# EAGLE board Grand Jofo (EAGLE 9.7.0)

Size 134.13 x 111.5 mm. Coordinates in mm from the lower left corner, seen from the top.
Outline: 0,0 134.13,0 134.13,111.5 0,111.5 0,0
Copper layers (1*16): Top 0.035mm / dielectric 1.5mm / Bottom 0.035mm
Design rules "default": minimum track width 6mil, minimum drill 0.35mm, track to track 6mil, track to pad 6mil, pad to pad 6mil, via to via 6mil, smd to smd 6mil, copper to edge 40mil, drill to drill 6mil, minimum pad ring 10mil, minimum via ring 8mil, stop-mask expansion 4mil, vias tented up to drill 0mil, thermal gap 10mil

## Footprints (pad centres in the part's own frame; a part is rotated, then mirrored left to right if it is on the bottom)
LEDRD254W60D565H860B = drill 0.981 pad 1.581: 1 -1.27,0; 2 1.27,0
BATTERY-GENERIC = drill 1.118 pad 3.15 octagon: + 2.54,0; - -2.54,0
SWITCH-SPDT-PTH-8.5X3.7MM = drill 1.016 pad 1.88: 1 -2.54,0; 2 0,0; 3 2.54,0
DIP762W53P254L1969H508Q14B = drill 0.743 pad 1.343: 1 -3.81,7.62; 2 -3.81,5.08; 3 -3.81,2.54; 4 -3.81,0; 5 -3.81,-2.54; 6 -3.81,-5.08; 7 -3.81,-7.62; 8 3.81,-7.62; 9 3.81,-5.08; 10 3.81,-2.54; 11 3.81,0; 12 3.81,2.54; 13 3.81,5.08; 14 3.81,7.62

## Placement (x,y rotation side)
D1  RED  [LEDRD254W60D565H860B]  124.06,103.59 180 top
D2  RED  [LEDRD254W60D565H860B]  114.38,103.51 180 top
D3  RED  [LEDRD254W60D565H860B]  46.07,8.45 180 top
D4  RED  [LEDRD254W60D565H860B]  39.17,8.24 180 top
P1  BATTERYGENERIC  [BATTERY-GENERIC]  20.56,92.84 180 top
S1  TOGGLE  [SWITCH-SPDT-PTH-8.5X3.7MM]  78.14,100.13 0 top
S3  TOGGLE  [SWITCH-SPDT-PTH-8.5X3.7MM]  92.72,100.13 0 top
S4  TOGGLE  [SWITCH-SPDT-PTH-8.5X3.7MM]  126.71,56.08 0 top
S5  TOGGLE  [SWITCH-SPDT-PTH-8.5X3.7MM]  126.08,47.93 0 top
S6  TOGGLE  [SWITCH-SPDT-PTH-8.5X3.7MM]  57.98,6.99 0 top
S7  TOGGLE  [SWITCH-SPDT-PTH-8.5X3.7MM]  68.63,7.4 0 top
S8  TOGGLE  [SWITCH-SPDT-PTH-8.5X3.7MM]  7.42,39.79 0 top
S9  TOGGLE  [SWITCH-SPDT-PTH-8.5X3.7MM]  8.04,29.97 0 top
U1  74HC32_PDIP  [DIP762W53P254L1969H508Q14B]  64.65,47.65 90 top

## Library data of the parts
D1-D4 = Tinkercad; CATEGORY: Opto-Electronic; SUB-CATEGORY: LED; VALUE: LED_RED
P1 S1 S3-S9 U1 = Tinkercad

## Nets
P1+: P1.+ S1.1 S3.1 S4.1 S5.1 S8.1 S9.1 U1.14
P1-: D1.2 D2.2 D3.2 D4.2 P1.- S1.3 S3.3 S4.3 S5.3 S6.3 S7.3 S8.3 S9.3 U1.7
U1_1A: S8.2 U1.1
U1_1B: S9.2 U1.2
U1_1Y: D4.1 U1.3
U1_2A: S6.2 U1.4
U1_2B: S7.2 U1.5
U1_2Y: D3.1 U1.6
U1_3A: S4.2 U1.9
U1_3B: S5.2 U1.10
U1_3Y: D1.1 U1.8
U1_4A: S3.2 U1.12
U1_4B: S1.2 U1.13
U1_4Y: D2.1 U1.11

## Tracks (layer width: path | path; a pad name or v marks a point on that pad's centre or on a via)
P1+  (7 unrouted)
P1-  (13 unrouted)
U1_1A  (1 unrouted)
U1_1B  (1 unrouted)
U1_1Y  (1 unrouted)
U1_2A  (1 unrouted)
U1_2B  (1 unrouted)
U1_2Y  (1 unrouted)
U1_3A  (1 unrouted)
U1_3B  (1 unrouted)
U1_3Y  (1 unrouted)
U1_4A  (1 unrouted)
U1_4B  (1 unrouted)
U1_4Y  (1 unrouted)